# EAGLE board CT_schematic (EAGLE 7.6.0)

Size 100 x 80 mm. Coordinates in mm from the lower left corner, seen from the top.
Outline: 0,0 100,0 100,80 0,80 0,0
Copper layers (1*16): Top 0.035mm / dielectric 1.5mm / Bottom 0.035mm
Design rules "default": minimum track width 10mil, minimum drill 24mil, track to track 8mil, track to pad 8mil, pad to pad 8mil, via to via 8mil, smd to smd 8mil, copper to edge 40mil, drill to drill 8mil, minimum pad ring 10mil, minimum via ring 8mil, stop-mask expansion 4mil, vias tented up to drill 0mil, thermal gap 10mil

## Footprints (pad centres in the part's own frame; a part is rotated, then mirrored left to right if it is on the bottom)
C0603 = smd 0.8 x 0.8: 1 -0.762,0; 2 0.762,0
C0402 = smd 0.5 x 0.5: 1 -0.508,0; 2 0.508,0
C1210 = smd 1.2 x 2.5: 1 -1.524,0; 2 1.524,0
C0805 = smd 1.2 x 1.3: 1 -1.016,0; 2 1.016,0
R0603 = smd 0.8 x 0.8: 1 -0.762,0; 2 0.762,0
EXV-9H = smd 3.505 x 1.676: 1 -2.857,0; 2 2.857,0
L0603 = smd 0.8 x 0.8: 1 -0.762,0; 2 0.762,0
PJ-037B_PACKAGE = drill 3.7 square: 1 12,0 | drill 3.2 square: 2 6,0
UFQFPN48 = smd 0.559 x 0.305: 1 -3.375,2.751; 2 -3.375,2.251; 3 -3.375,1.75; 4 -3.375,1.25; 5 -3.375,0.75; 6 -3.375,0.25; 7 -3.375,-0.25; 8 -3.375,-0.75; 9 -3.375,-1.25; 10 -3.375,-1.75; 11 -3.375,-2.251; 12 -3.375,-2.751; 25 3.375,-2.751; 26 3.375,-2.251; 27 3.375,-1.75; 28 3.375,-1.25; 29 3.375,-0.75; 30 3.375,-0.25; 31 3.375,0.25; 32 3.375,0.75; 33 3.375,1.25; 34 3.375,1.75; 35 3.375,2.251; 36 3.375,2.751 | smd 0.305 x 0.559: 13 -2.751,-3.375; 14 -2.251,-3.375; 15 -1.75,-3.375; 16 -1.25,-3.375; 17 -0.75,-3.375; 18 -0.25,-3.375; 19 0.25,-3.375; 20 0.75,-3.375; 21 1.25,-3.375; 22 1.75,-3.375; 23 2.251,-3.375; 24 2.751,-3.375; 37 2.751,3.375; 38 2.251,3.375; 39 1.75,3.375; 40 1.25,3.375; 41 0.75,3.375; 42 0.25,3.375; 43 -0.25,3.375; 44 -0.75,3.375; 45 -1.25,3.375; 46 -1.75,3.375; 47 -2.251,3.375; 48 -2.751,3.375 | smd 5.588 x 5.588: 49 0,0
A2200-A = smd 1.5 x 0.8: 1 -4.85,6.35; 2 -4.85,5.08; 3 -4.85,3.81; 4 -4.85,2.54; 5 -4.85,1.27; 6 -4.85,0; 7 -4.85,-1.27; 8 -4.85,-2.54; 9 -4.85,-3.81; 10 -4.85,-5.08; 11 -4.85,-6.35; 12 4.85,-6.35; 13 4.85,-5.08; 14 4.85,-3.81; 15 4.85,-2.54; 16 4.85,-1.27; 17 4.85,0; 18 4.85,1.27; 19 4.85,2.54; 20 4.85,3.81; 21 4.85,5.08; 22 4.85,6.35 | smd 1.2 x 1.2: 23 -2,2; 24 -2,0; 25 -2,-2; 26 0,-2; 27 0,0; 28 0,2; 29 2,2; 30 2,0; 31 2,-2
COAXIAL_C = smd 1 x 1: 1 0,-1.5; 2 0,1.5 | smd 1.05 x 2.2: 3 -1.475,0; 4 1.475,0
MICRO_USB_AB = smd 0.4 x 1.35: 1 1.3,0.26; 2 0.65,0.26; 3 0,0.26; 4 -0.65,0.26; 5 -1.3,0.26 | drill 0.6 pad 0.95 long: 6 4.175,-2.54; 7 -4.175,-2.54 | drill 0.7 pad 1.1 long: 8 -2.225,0.46; 9 2.225,0.46
SOT143B = smd 1 x 0.7: 1 -0.75,-1 | smd 0.6 x 0.7: 2 0.95,-1; 3 0.95,1; 4 -0.95,1
ABLS-25.000MHZ-B2F-T = smd 5.6 x 2.8: 1 -3.81,0; 2 5.69,0
ASEK = smd 1.4 x 1: 1 -1.1,-0.8; 2 1.1,-0.8; 3 1.1,0.8; 4 -1.1,0.8
WSON-8 = smd 0.3 x 0.6: 1 -0.75,0; 2 0.05,0; 3 0.85,0; 4 1.65,0; 5 1.65,3.8; 6 0.85,3.8; 7 0.05,3.8; 8 -0.75,3.8 | smd 3 x 2.6: PAD 0.45,1.9
SON-6 = smd 0.55 x 0.3: 1 -0.355,0.5 | smd 0.52 x 0.3: 2 -0.37,0; 3 -0.37,-0.5; 4 0.37,-0.5; 5 0.37,0; 6 0.37,0.5
DCU0008A_N = smd 0.5 x 0.3: 1 -1.6,0.75; 2 -1.6,0.25; 3 -1.6,-0.25; 4 -1.6,-0.75; 5 1.6,-0.75; 6 1.6,-0.25; 7 1.6,0.25; 8 1.6,0.75
SW_4-1437565-2 = smd 1.4 x 2.1: 1 -2.23,4.55; 2 -2.23,-4.55; 3 2.23,4.55; 4 2.23,-4.55
LGM67K-G1J2-24-Z = smd 0.8 x 1.4: A -2,0; C 0,0
NC7SZ125M5X = smd 1.3 x 0.7: 1 -1.3,0.95; 2 -1.3,0; 3 -1.3,-0.95; 4 1.3,-0.95; 5 1.3,0.95

## Placement (x,y rotation side)
C1  1e-06  [C0603]  -46.99,64.77 0 top  (outside the outline)
C2  1e-07  [C0603]  -50.8,64.77 0 top  (outside the outline)
C3  1e-07  [C0603]  -54.61,64.77 0 top  (outside the outline)
C4  1e-07  [C0603]  -58.42,64.77 0 top  (outside the outline)
C5  4.7e-06  [C0603]  -39.37,64.77 0 top  (outside the outline)
C6  1e-07  [C0603]  -62.23,64.77 0 top  (outside the outline)
C7  4.7e-06  [C0603]  -43.18,64.77 0 top  (outside the outline)
C8  1e-08  [C0603]  -66.04,64.77 0 top  (outside the outline)
C9  1e-06  [C0603]  -15.24,69.85 0 top  (outside the outline)
C10  1e-11  [C0402]  -57.15,69.85 0 top  (outside the outline)
C11  1e-11  [C0402]  -60.96,69.85 0 top  (outside the outline)
C12  1e-07  [C0402]  -64.77,69.85 0 top  (outside the outline)
C13  1e-08  [C0402]  -15.24,74.93 0 top  (outside the outline)
C14  1e-08  [C0402]  -19.05,74.93 0 top  (outside the outline)
C15  1e-05  [C1210]  -49.53,52.07 0 top  (outside the outline)
C16  1e-05  [C0805]  -21.59,58.42 0 top  (outside the outline)
C17  8e-07  [R0603]  -19.05,69.85 0 top  (outside the outline)
C18  1e-05  [C1210]  -55.88,52.07 0 top  (outside the outline)
C19  1e-07  [C0402]  -22.86,74.93 0 top  (outside the outline)
C20  0.0001  [EXV-9H]  -40.64,44.45 0 top  (outside the outline)
C21  0.0001  [EXV-9H]  -52.07,44.45 0 top  (outside the outline)
C22  1e-08  [C0402]  -26.67,74.93 0 top  (outside the outline)
C23  1e-07  [C0402]  -30.48,74.93 0 top  (outside the outline)
C24  1e-08  [C0402]  -34.29,74.93 0 top  (outside the outline)
C25  1e-07  [C0402]  -38.1,74.93 0 top  (outside the outline)
C26  1e-08  [C0402]  -41.91,74.93 0 top  (outside the outline)
C27  1e-08  [C0402]  -45.72,74.93 0 top  (outside the outline)
F1  240.0  [L0603]  -22.86,69.85 0 top  (outside the outline)
J1  PJ-037B  [PJ-037B_PACKAGE]  -40.64,7.62 0 top  (outside the outline)
R1  10000.0  [R0603]  -62.23,58.42 0 top  (outside the outline)
R2  1000.0  [R0603]  -26.67,69.85 0 top  (outside the outline)
R3  910.0  [R0603]  -30.48,69.85 0 top  (outside the outline)
R4  4700.0  [R0603]  -34.29,69.85 0 top  (outside the outline)
R5  4700.0  [R0603]  -38.1,69.85 0 top  (outside the outline)
R6  2200.0  [R0603]  -41.91,69.85 0 top  (outside the outline)
R7  2200.0  [R0603]  -45.72,69.85 0 top  (outside the outline)
R8  10000.0  [R0603]  -15.24,64.77 0 top  (outside the outline)
R9  10000.0  [R0603]  -20.32,64.77 0 top  (outside the outline)
R10  100000.0  [R0603]  -31.75,58.42 0 top  (outside the outline)
R11  806.0  [R0603]  -49.53,69.85 0 top  (outside the outline)
R12  1000.0  [R0603]  -53.34,69.85 0 top  (outside the outline)
R13  100000.0  [R0603]  -36.83,58.42 0 top  (outside the outline)
R14  153694.38  [R0603]  -26.67,58.42 0 top  (outside the outline)
R15  100000.0  [R0603]  -41.91,58.42 0 top  (outside the outline)
R16  10000.0  [R0603]  -25.4,64.77 0 top  (outside the outline)
R17  10000.0  [R0603]  -30.48,64.77 0 top  (outside the outline)
R18  82000.0  [R0603]  -35.56,64.77 0 top  (outside the outline)
R19  300000.0  [R0603]  -46.99,58.42 0 top  (outside the outline)
R20  120000.0  [R0603]  -52.07,58.42 0 top  (outside the outline)
R21  200000.0  [R0603]  -57.15,58.42 0 top  (outside the outline)
U1  stm32f048c6u7  [UFQFPN48]  -36.83,35.56 0 top  (outside the outline)
U2  A2200-A  [A2200-A]  -19.05,10.16 0 top  (outside the outline)
U3  73412-0114  [COAXIAL_C]  -50.8,35.56 0 top  (outside the outline)
U4  47590-0001  [MICRO_USB_AB]  -49.53,7.62 0 top  (outside the outline)
U5  prtr5v0u2ax  [SOT143B]  -58.42,74.93 0 top  (outside the outline)
U6  ABLS-25.000MHZ-B2F-T  [ABLS-25.000MHZ-B2F-T]  -26.67,52.07 0 top  (outside the outline)
U7  ASEK-2-32.768KHz-ECST  [ASEK]  -31.75,44.45 0 top  (outside the outline)
U8  LP3878SDX-ADJ/NOPB  [WSON-8]  -49.53,22.86 0 top  (outside the outline)
U9  LP2951ACSDX/NOPB  [WSON-8]  -29.21,34.29 0 top  (outside the outline)
U10  TPS3895ADRYR  [SON-6]  -29.21,78.74 0 top  (outside the outline)
U11  LSF0102DCTR  [DCU0008A_N]  -24.13,78.74 0 top  (outside the outline)
U12  4-1437565-2  [SW_4-1437565-2]  -27.94,25.4 0 top  (outside the outline)
U13  Q65110A2395  [LGM67K-G1J2-24-Z]  -38.1,52.07 0 top  (outside the outline)
U14  nc7sz125m5x  [NC7SZ125M5X]  -60.96,50.8 0 top  (outside the outline)
U15  nc7sz125m5x  [NC7SZ125M5X]  -15.24,58.42 0 top  (outside the outline)

## Library data of the parts
C1-C27 F1 J1 R1-R21 U1-U15 = circuit_tree

## Nets
CLK_CRYSTAL_U1_5: C10.1 U1.5 U6.1
CLK_CRYSTAL_U1_6: C11.1 U1.6 U6.2
CLK_U1_3: U1.3 U7.3
GND: C1.2 C2.2 C3.2 C4.2 C5.2 C6.2 C7.2 C8.2 C9.2 C10.2 C11.2 C12.2 C13.2 C14.2 C15.2 C16.2 C17.2 C18.2 C19.2 C20.2 C21.2 C22.2 C23.2 C24.2 C25.2 C26.2 C27.2 J1.2 R2.2 R8.2 R12.2 R15.2 R18.2 R20.2 U1.8 U1.23 U1.35 U1.47 U1.49 U2.7 U2.8 U2.23 U2.24 U2.25 U2.26 U2.27 U2.28 U2.29 U2.30 U2.31 U4.5 U4.6 U4.7 U4.8 U4.9 U5.1 U7.2 U8.3 U8.PAD U9.3 U9.4 U9.PAD U10.2 U11.1 U13.C U14.1 U14.3 U15.1 U15.3
NET_U1_7: R5.1 U1.7 U15.4
NET_U1_9: C8.1 C9.1 F1.1 U1.9
NET_U1_20: R8.1 U1.20
NET_U1_21: R6.1 U1.21 U11.4
NET_U1_22: R7.1 U1.22 U11.3
NET_U1_45: R3.1 U1.45 U13.A
NET_U1_46: R1.1 U1.46 U12.3 U12.4
NET_U2_2: R9.2 U2.2
NET_U2_6: U2.6
NET_U2_17: R9.1 U2.17
NET_U2_19: U2.19
NET_U2_22: R4.1 U2.22 U14.4
NET_U3_1: U2.11 U3.1
NET_U3_2: U2.10 U3.2 U3.3 U3.4
NET_U5_4: U4.1 U5.4
NET_U8_1: C14.1 U8.1
NET_U8_6: R11.2 R12.1 U8.6
NET_U8_8: R10.1 U8.8
NET_U9_5: R13.1 U9.5
NET_U9_7: R14.2 R15.1 U9.7
NET_U10_1: R17.1 R18.1 U10.1
NET_U10_3: R19.2 R20.1 U10.3
NET_U10_4: R16.1 U10.4 U14.2 U15.2
NET_U11_8: R21.1 U11.8
NET_U12_1: R2.1 U12.1 U12.2
PROC_I2C1_SCL_TOXCVR: U2.15 U11.5
PROC_I2C1_SDA_TOXCVR: U2.16 U11.6
PROC_USB_DM: U1.32 U4.2 U5.3
PROC_USB_DP: U1.33 U4.3 U5.2
VCC_S1_14V5: C15.1 C17.1 C20.1 C21.1 J1.1 R10.2 U8.4 U9.8
VCC_TIER1_1V8: C1.1 C2.1 C3.1 C4.1 C5.1 C6.1 C7.1 C13.1 C16.1 C19.1 C24.1 C25.1 C26.1 C27.1 F1.2 R1.2 R3.2 R5.2 R6.2 R7.2 R11.1 R16.2 R17.2 R19.1 U1.1 U1.24 U1.36 U1.48 U7.4 U8.5 U10.6 U11.2 U14.5 U15.5
VCC_TIER1_3V3: C12.1 C18.1 C22.1 C23.1 R4.2 R13.2 R14.1 R21.2 U2.20 U9.1 U11.7

## Tracks (layer width: path | path; a pad name or v marks a point on that pad's centre or on a via)
CLK_CRYSTAL_U1_5  (2 unrouted)
CLK_CRYSTAL_U1_6  (2 unrouted)
CLK_U1_3  (1 unrouted)
GND  (68 unrouted)
NET_U1_7  (2 unrouted)
NET_U1_9  (3 unrouted)
NET_U1_20  (1 unrouted)
NET_U1_21  (2 unrouted)
NET_U1_22  (2 unrouted)
NET_U1_45  (2 unrouted)
NET_U1_46  (3 unrouted)
NET_U2_2  (1 unrouted)
NET_U2_17  (1 unrouted)
NET_U2_22  (2 unrouted)
NET_U3_1  (1 unrouted)
NET_U3_2  (3 unrouted)
NET_U5_4  (1 unrouted)
NET_U8_1  (1 unrouted)
NET_U8_6  (2 unrouted)
NET_U8_8  (1 unrouted)
NET_U9_5  (1 unrouted)
NET_U9_7  (2 unrouted)
NET_U10_1  (2 unrouted)
NET_U10_3  (2 unrouted)
NET_U10_4  (3 unrouted)
NET_U11_8  (1 unrouted)
NET_U12_1  (2 unrouted)
PROC_I2C1_SCL_TOXCVR  (1 unrouted)
PROC_I2C1_SDA_TOXCVR  (1 unrouted)
PROC_USB_DM  (2 unrouted)
PROC_USB_DP  (2 unrouted)
VCC_S1_14V5  (7 unrouted)
VCC_TIER1_1V8  (33 unrouted)
VCC_TIER1_3V3  (10 unrouted)